# Altium PCB PCB.PcbDoc
Units mm, origin at the board's own origin, x right, y up, seen from the top; angles counter-clockwise.
Board outline 32.21 x 40 mm, 4 copper layers (Top Layer, Signal Layer 1, Signal Layer 2, Bottom Layer), stack 0.778 mm thick; 94 components, 53 nets, 416 pads, 156 vias.
Unrouted connection lines stored in the file: 8.
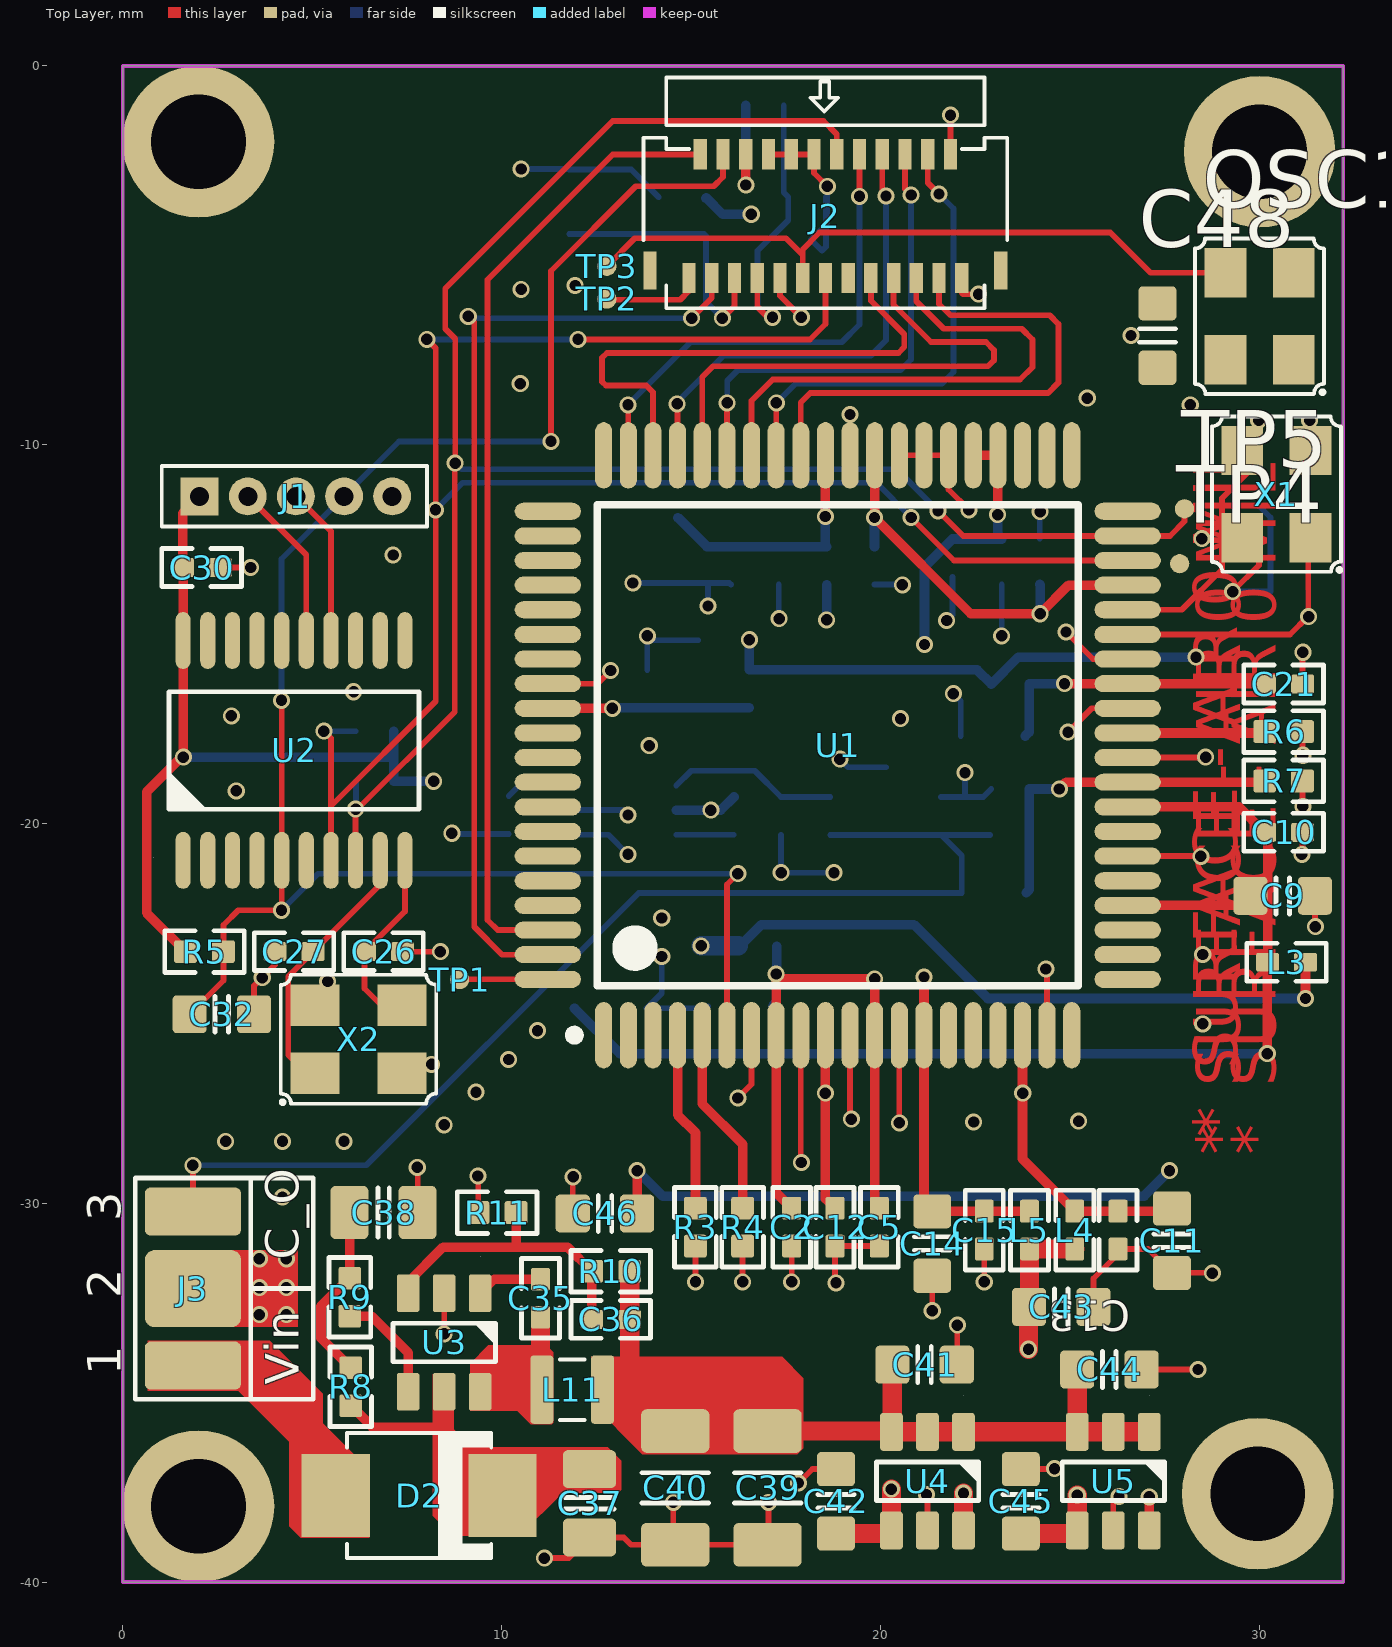
[diagram p0: Top Layer view]
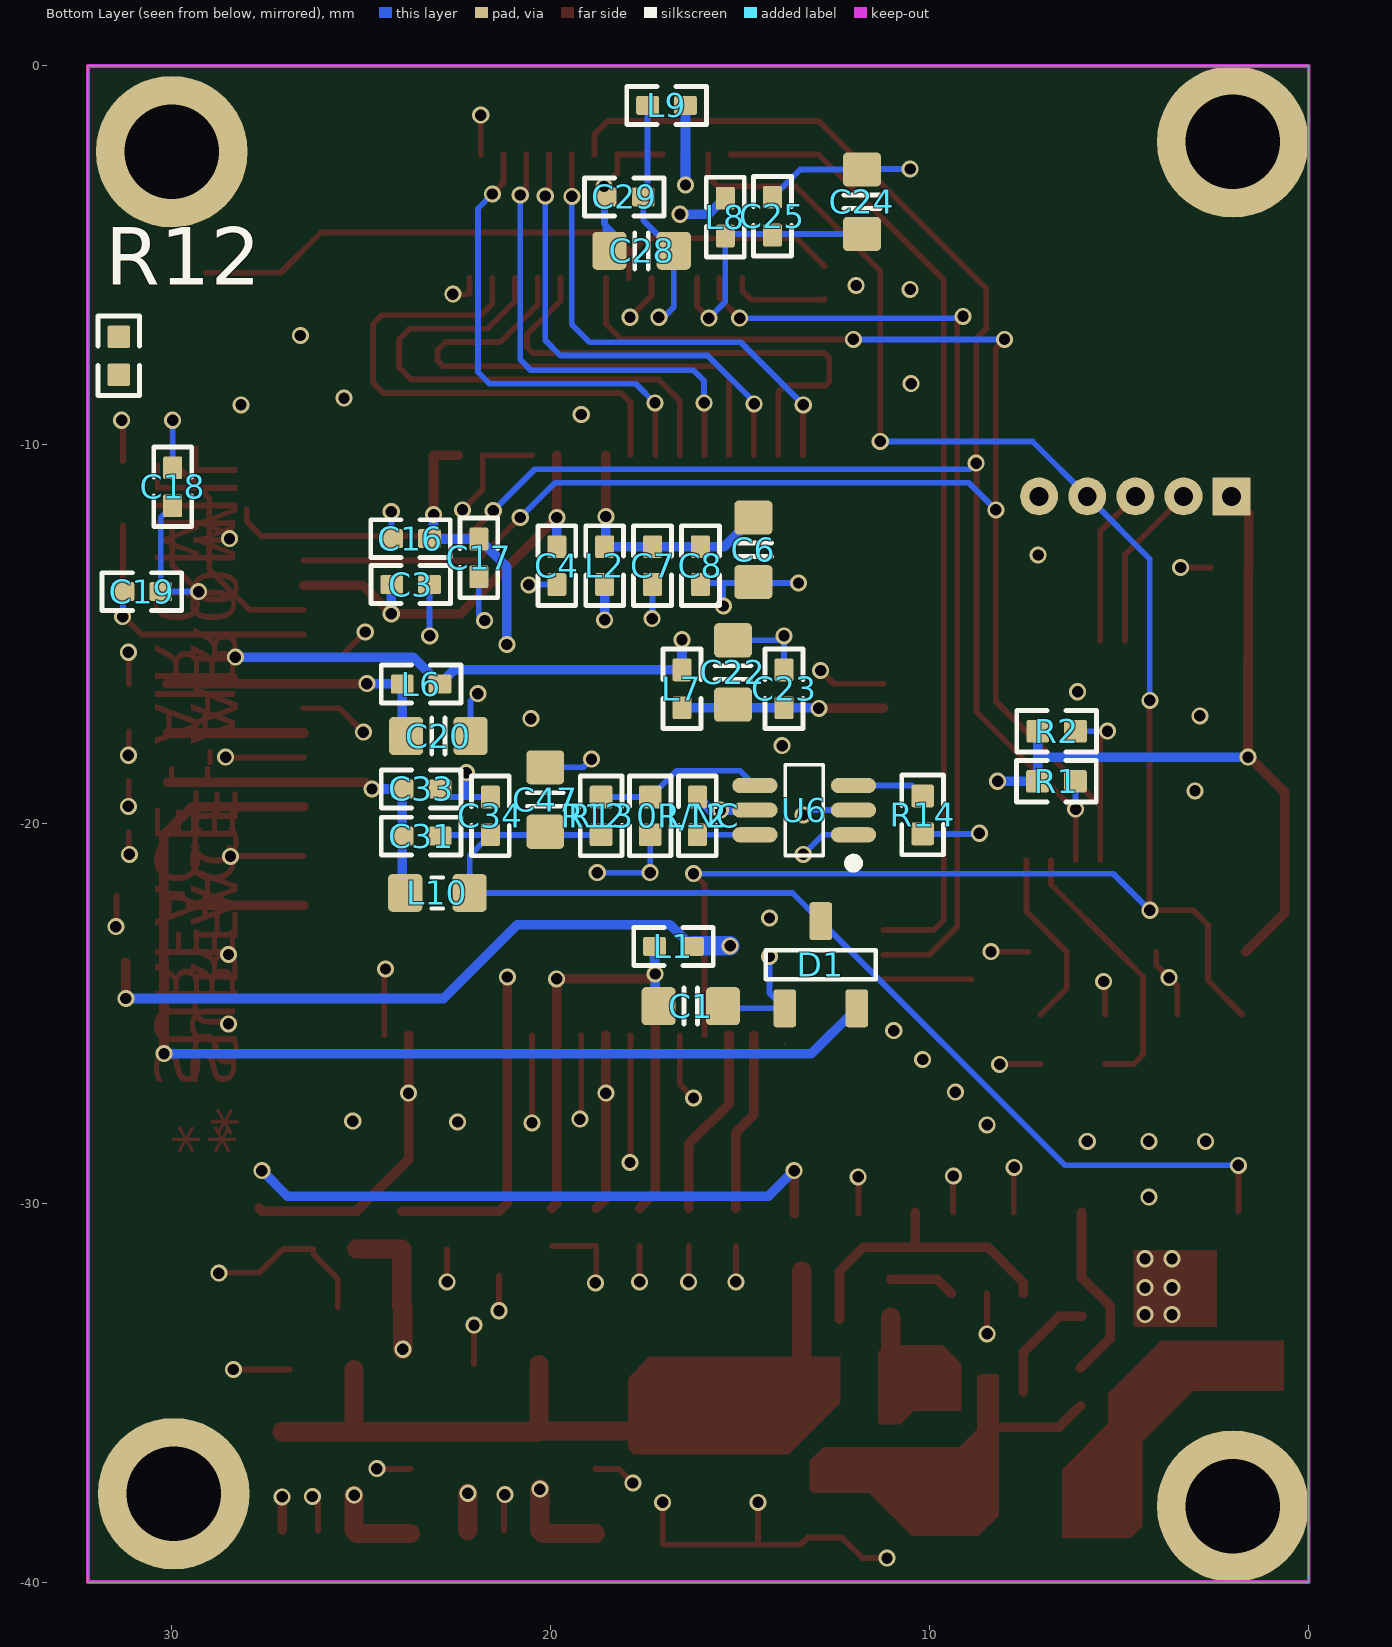
[diagram p1: Bottom Layer view, seen from below]
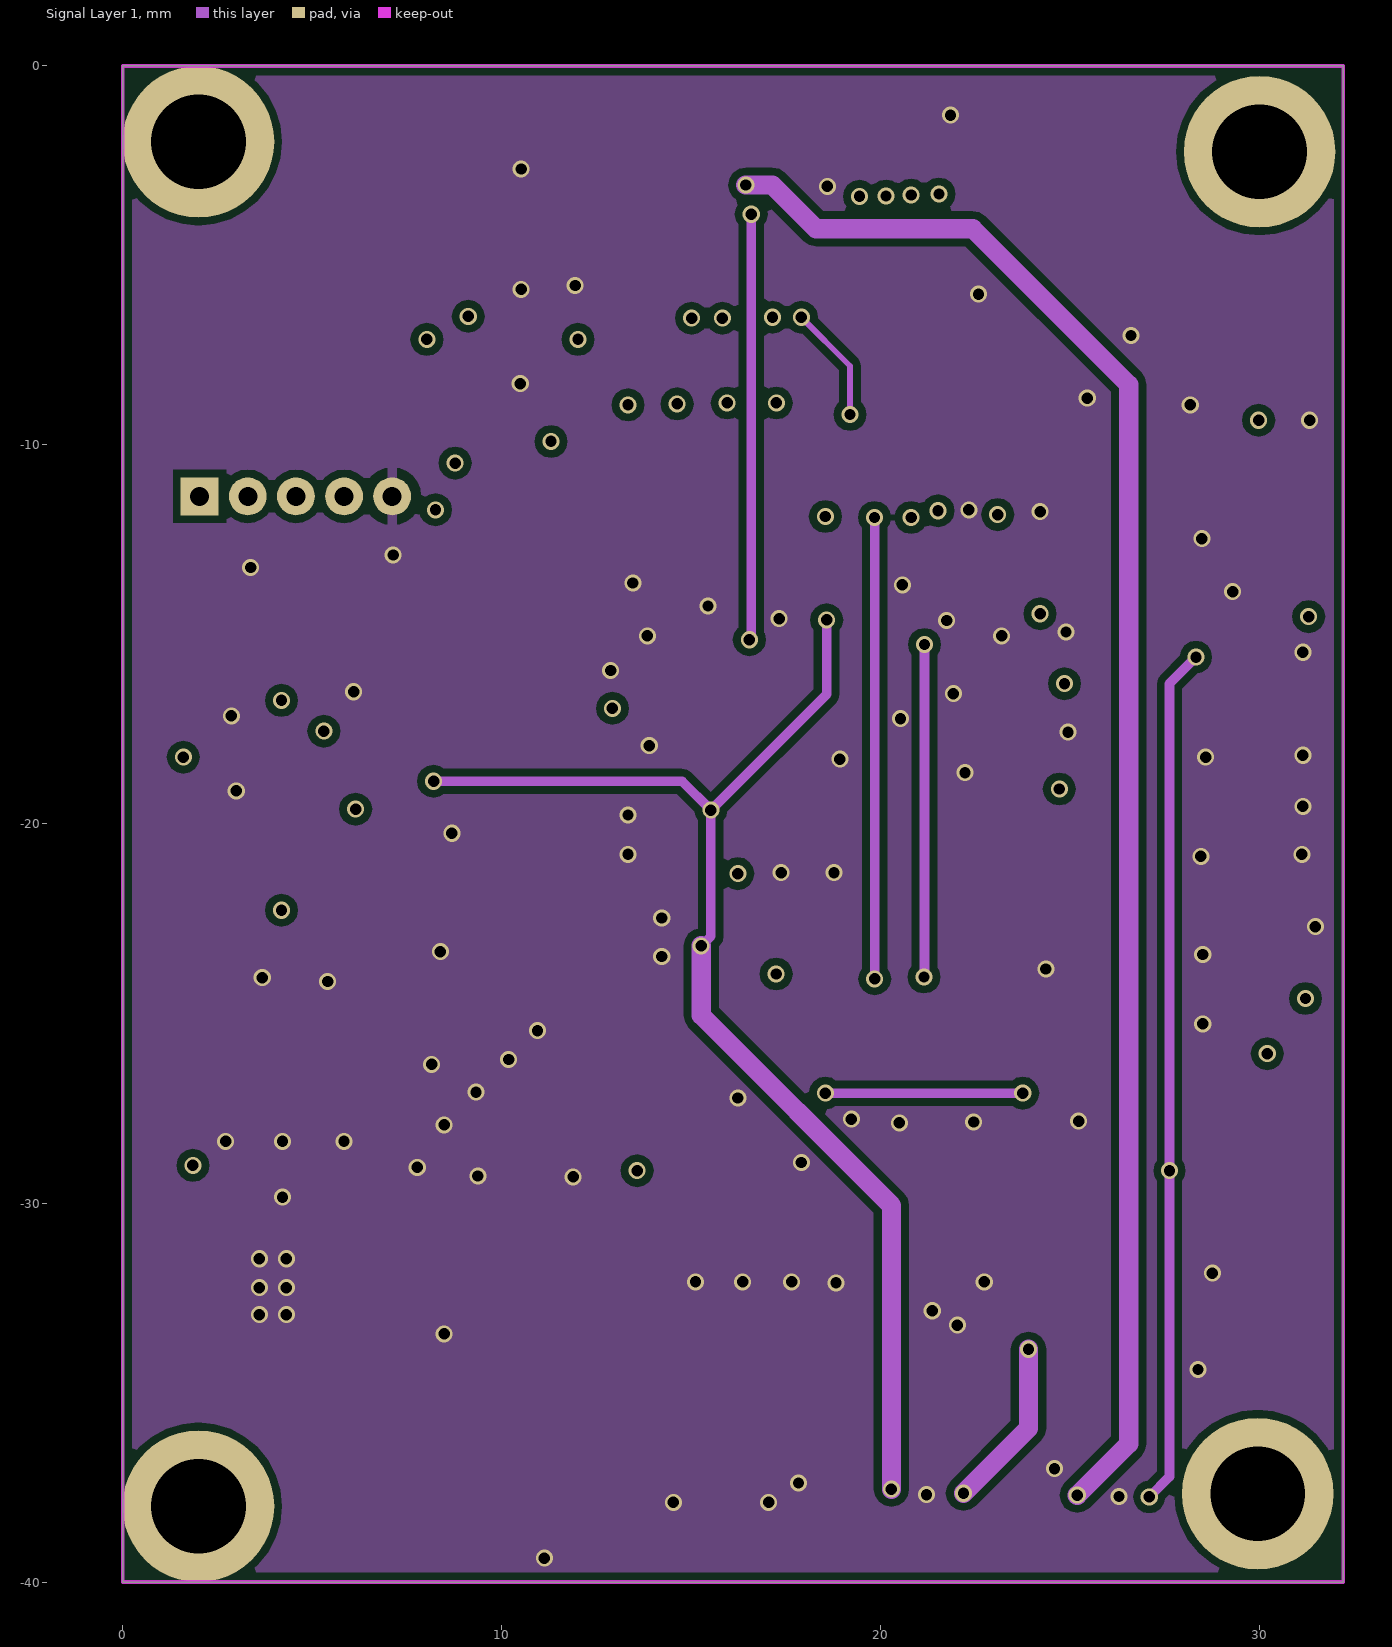
[diagram p2: Signal Layer 1]
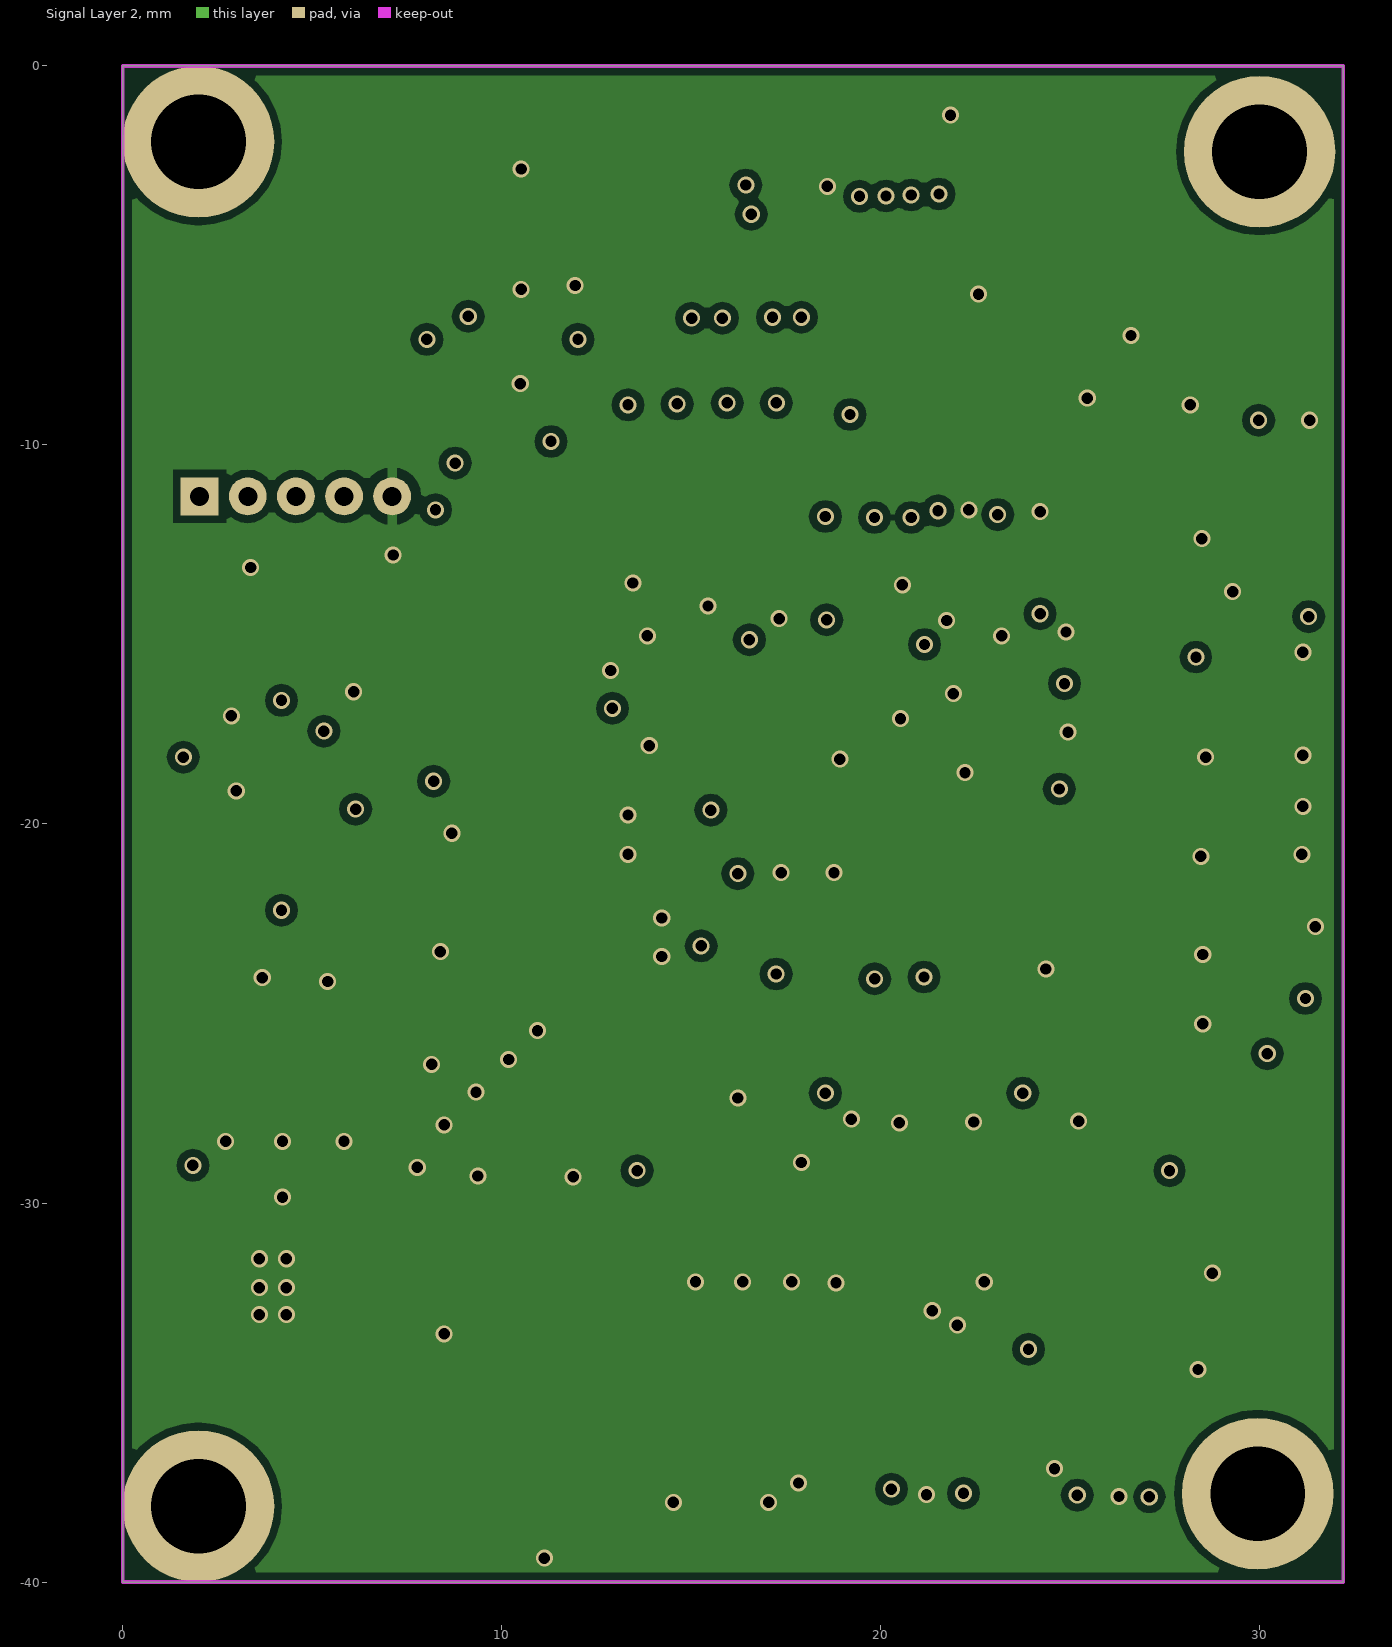
[diagram p3: Signal Layer 2]
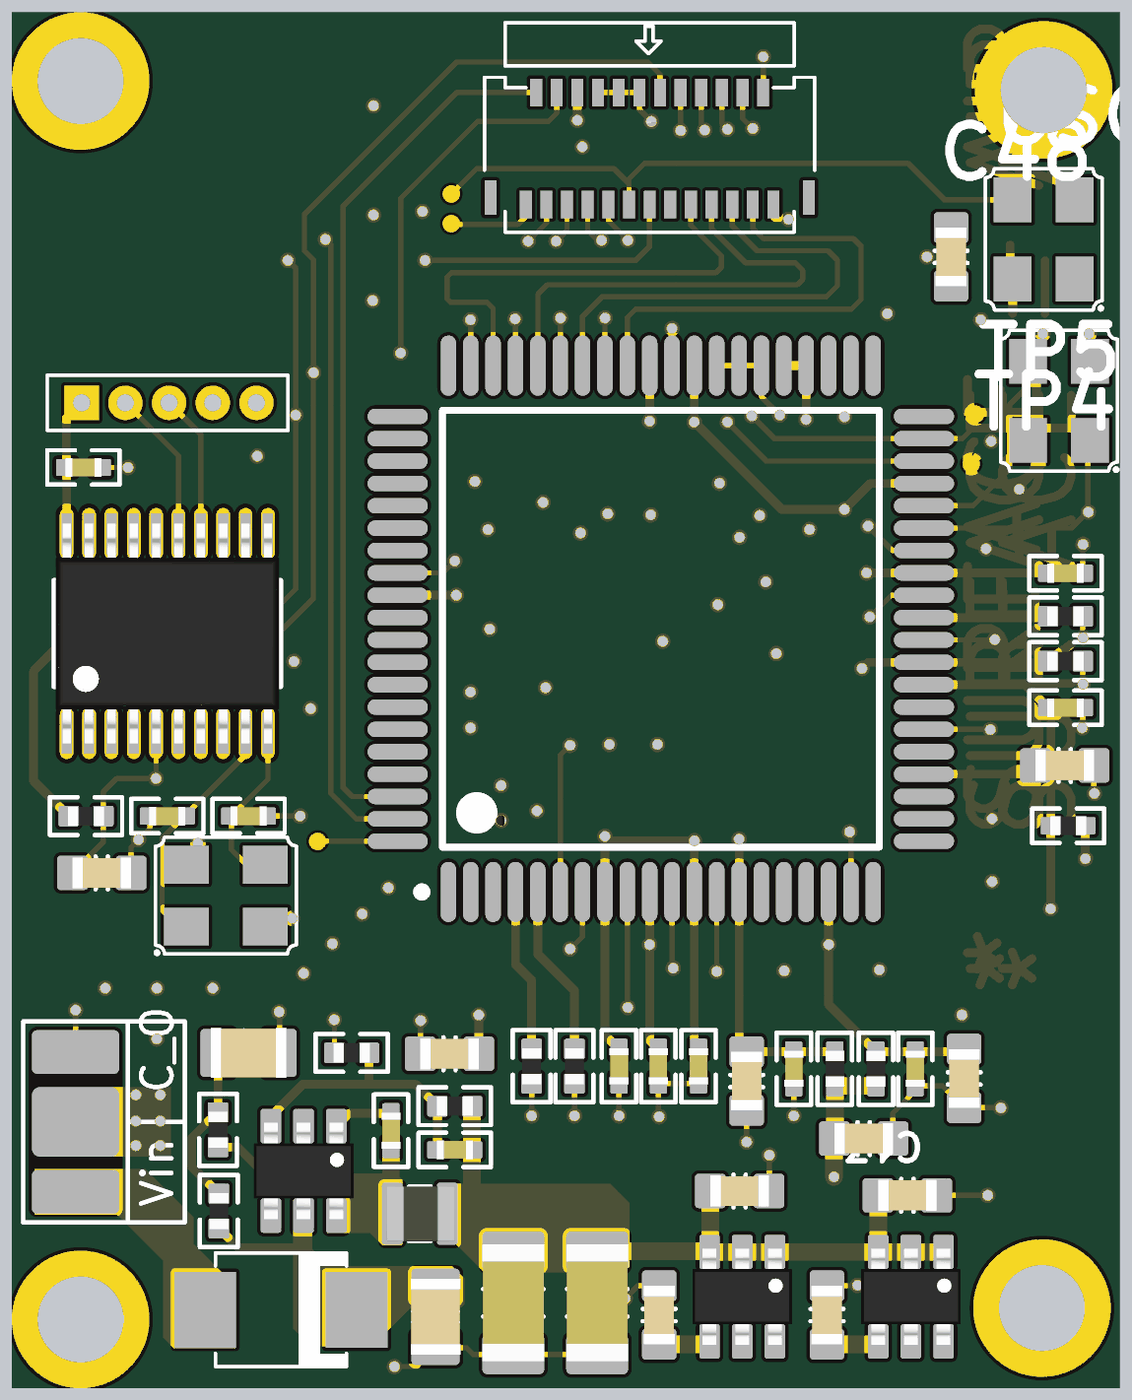
[diagram p4: 3D render of the assembled board from above, using the file's embedded part models]
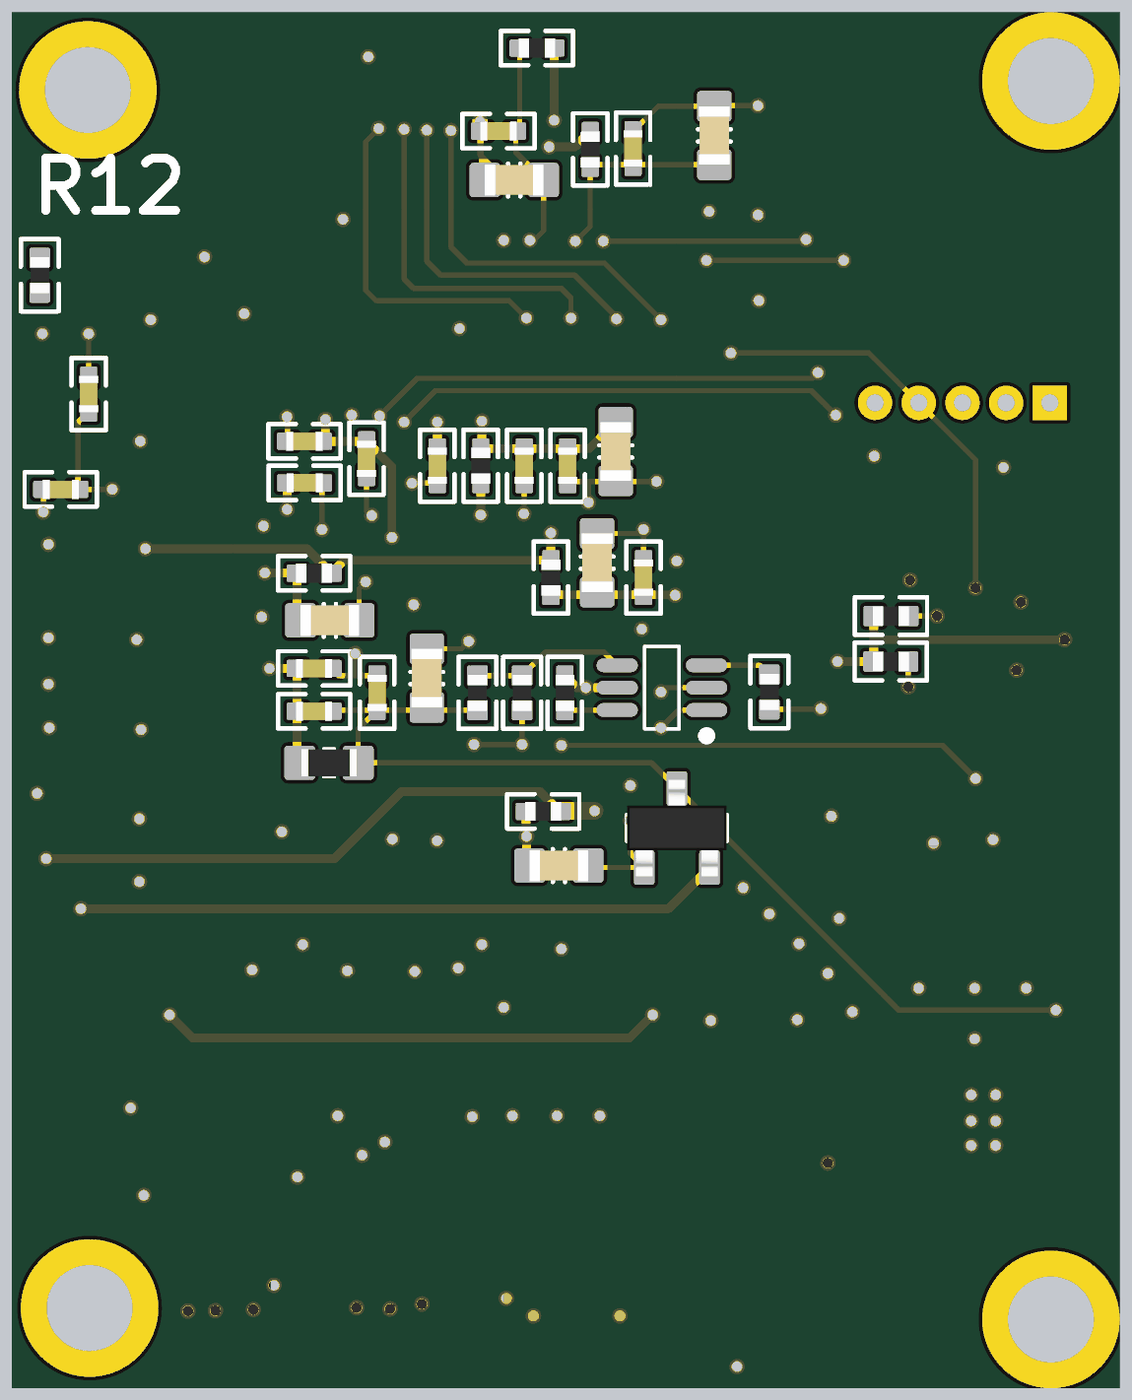
[diagram p5: 3D render of the assembled board from below, using the file's embedded part models]

## Layer stack, top to bottom
Top Solder: solder mask 0.0102, Solder Resist, Dk 3.5
Top Layer: signal copper 0.0356
GND: core 0.254, FR-4, Dk 4.2
Signal Layer 1: signal copper 0.036
Dielectric 3: prepreg 0.127, Dk 4.2
Signal Layer 2: signal copper 0.036
VCC: core 0.254, Dk 4.2
Bottom Layer: signal copper 0.0356
Bottom Solder: solder mask 0.0102, Solder Resist, Dk 3.5

## Board outline
0,-40 0,0 32.207,0 32.207,-40

## Design rules (kind name [scope] priority, off if disabled: settings)
Clearance Clearance_1 [(InNamedPolygon('GND_BOT') OR InNamedPolygon('GND_TOP'))] p1: gap=0.3
Clearance [All] p2: gap=0.2
FabricationTestPointUsage TestPointUsage [All] p1: valid=0 allowmultiple=FALSE
FabricationTestpoint Testpoint [All] p1: side=3 testpointundercomponent=TRUE minsize=1.016 maxsize=2.54 preferedsize=1.524 minholesize=0 maxholesize=1.016 preferedholesize=0.813 testpointgrid=0.025 allowsidetop=TRUE allowsidebottom=TRUE usegrid=TRUE gridtolerance=0
PolygonConnect PolygonConnect_1 [(InPadClass('All Pads'))] p1: connectstyle=Relief reliefconductorwidth=0.254 reliefentries=4 polygonreliefangle="90 Angle" airgapwidth=0.254
PolygonConnect [All] p2: connectstyle=Direct reliefconductorwidth=0.254 reliefentries=4 polygonreliefangle="90 Angle" airgapwidth=0.254
RoutingVias [All] p1: holewidth=0.3 width=0.45 viastyle="Through Hole" minholewidth=0.3 minwidth=0.45 maxholewidth=0.3 maxwidth=0.45
SilkToSolderMaskClearance SilkscreenOverComponentPads [IsPad] p1: minsilkscreentomaskgap=0.254 clearancetoexposedcopper=TRUE
SolderMaskExpansion [All] p1: expansion=0.102
Width [All] p1: maxlimit=1 minlimit=0.152 preferedwidth=0.4
27 further rules are at their usual default settings.

## Classes and differential pairs
component class POWER: C35 C36 C37 C38 C39 C40 C41 C42 C43 C44 C45 C46 C48 D2 J3 L11 OSC1 R8 R9 R10 R11 U3 U4 U5
component class MAIN: C1 C2 C3 C4 C5 C6 C7 C8 C9 C10 C11 C12 C13 C14 C15 C16 C17 C18 C19 C20 C21 C22 C23 C24 C25 C26 C27 C28 C29 C30 C31 C32 C33 C34 C47 D1 J1 J2 L1 L2 L3 L4 L5 L6 L7 L8 L9 L10 L12 R1 R2 R3 R4 R5 R6 R7 R12 "R12 0R/NC" R13 R14 TP1 TP2 TP3 TP4 TP5 U1 U2 U6 X1 X2
net class Undefined: D0 D1 D2 D3 D4 D5 D6 D7

## Components (designator, comment, footprint, x,y, rotation, side; value= is the part's Value field where it differs from the comment)
C1 "10uF" CAPC1608X90N 16.302,-24.806 r180 bottom
C2 "0.1uF" CAPC1005X55N 17.653,-30.638 r270 top
C3 "0.1uF" CAPC1005X55N 23.694,-13.681 r180 bottom
C4 "0.1uF" CAPC1005X55N 19.837,-13.183 r270 bottom
C5 "0.1uF" CAPC1005X55N 19.964,-30.638 r270 top
C6 "10uF" CAPC1608X90N 14.651,-12.766 r270 bottom
C7 "0.1uF" CAPC1005X55N 17.311,-13.183 r270 bottom
C8 "0.1uF" CAPC1005X55N 16.048,-13.183 r270 bottom
C9 "10uF" CAPC1608X90N 30.607,-21.895 r0 top
C10 "0.1uF" CAPC1005X55N 30.632,-20.218 r0 top
C11 "10uF" CAPC1608X90N 27.686,-30.993 r270 top
C12 "0.1uF" CAPC1005X55N 18.796,-30.638 r270 top
C13 "0.1uF" CAPC1005X55N 26.264,-30.714 r270 top
C14 "10uF" CAPC1608X90N 21.361,-31.069 r270 top
C15 "0.1uF" CAPC1005X55N 22.733,-30.714 r270 top
C16 "0.1uF" CAPC1005X55N 23.698,-12.471 r0 bottom
C17 "0.1uF" CAPC1005X55N 21.895,-12.979 r270 bottom
C18 "18pF" CAPC1005X55N 29.972,-11.1 r270 bottom
C19 "18pF" CAPC1005X55N 30.785,-13.868 r180 bottom
C20 "10uF" CAPC1608X90N 22.962,-17.678 r180 bottom
C21 "0.1uF" CAPC1005X55N 30.632,-16.307 r0 top
C22 "10uF" CAPC1608X90N 15.189,-16.002 r90 bottom
C23 "0.1uF" CAPC1005X55N 13.843,-16.434 r90 bottom
C24 "10uF" CAPC1608X90N 11.786,-3.581 r90 bottom
C25 "0.1uF" CAPC1005X55N 14.148,-3.962 r90 bottom
C26 "18pF" CAPC1005X55N 6.883,-23.368 r0 top
C27 "18pF" CAPC1005X55N 4.521,-23.368 r180 top
C28 "10uF" CAPC1608X90N 17.602,-4.877 r0 bottom
C29 "0.1uF" CAPC1005X55N 18.059,-3.454 r0 bottom
C30 "0.1uF" CAPC1005X55N 2.083,-13.233 r0 top
C31 "33pF" CAPC1005X55N 23.419,-20.32 r180 bottom
C32 "10uF" CAPC1608X90N 2.616,-25.019 r0 top
C33 "0.1uF" CAPC1005X55N 23.419,-19.075 r180 bottom
C34 "270PF" CAPC1005X55N 21.59,-19.787 r90 bottom
C35 "0.1uF" CAPC1005X55N 11.024,-32.512 r270 top
C36 "10nF" CAPC1005X55N 12.878,-33.071 r180 top
C37 "10uF/16V(2012)" CAPC2012X135N 12.319,-37.922 r270 top
C38 "10uF/16V(2012)" CAPC2012X135N 6.883,-30.251 r0 top
C39 "22uF/6.3V(3216)" CAPC3216X100N 17.018,-37.516 r270 top
C40 "22uF/6.3V(3216)" CAPC3216X100N 14.58,-37.516 r270 top
C41 "1uF/6.3V" CAPC1608X90N 21.158,-34.265 r0 top
C42 "1uF/6.3V" CAPC1608X90N 18.821,-37.871 r90 top
C43 "1uF/6.3V" CAPC1608X90N 24.765,-32.741 r0 top
C44 "1uF/6.3V" CAPC1608X90N 26.035,-34.392 r0 top
C45 "1uF/6.3V" CAPC1608X90N 23.698,-37.871 r90 top
C46 "1uF/6.3V" CAPC1608X90N 12.725,-30.277 r180 top
C47 "10uF" CAPC1608X90N 20.142,-19.355 r90 bottom
C48 "1uF/6.3V" CAPC1608X90N 27.305,-7.112 r90 top
D1 "BAT54SLT1" SOT23-3 12.873,-23.714 r90 bottom
D2 "RB050LA-40" RB50LA-40 7.823,-37.719 r270 top
J1 "1.27mm" "JP 1.27mm" 4.572,-11.354 r0 top
J2 "00  6296 025 230 883" "FPC ASSY 0.3MM" 18.542,-3.962 r0 top
J3 "pad_3point" Jump_3Way_Text1 1.854,-32.258 r90 top
L1 "FB" INDC1005N 16.759,-23.231 r0 bottom
L2 "FB" INDC1005N 18.574,-13.183 r90 bottom
L3 "FB" INDC1005N 30.709,-23.647 r180 top
L4 "FB" INDC1005N 25.121,-30.714 r90 top
L5 "FB" INDC1005N 23.927,-30.714 r90 top
L6 "FB" INDC1005N 23.419,-16.307 r0 bottom
L7 "FB" INDC1005N 16.535,-16.434 r270 bottom
L8 "FB" INDC1005N 15.392,-3.988 r270 bottom
L9 "FB" INDC1005N 16.942,-1.041 r0 bottom
L10 "FB" INDC1608N 22.987,-21.819 r180 bottom
L11 "NRS2012T 4R7M GJ" INDC2016X180N 11.862,-34.925 r0 top
L12 "FB" INDC1005N 16.129,-19.787 r90 bottom
OSC1 "27Mhz" XTAL-4pin-3225 29.997,-6.604 r90 top
R1 "4.7K" RESC1005X40N 6.655,-18.872 r0 bottom
R2 "4.7K" RESC1005X40N 6.65,-17.551 r0 bottom
R3 "10K" RESC1005X40N 15.113,-30.638 r90 top
R4 "10K" RESC1005X40N 16.358,-30.638 r90 top
R5 "10K" RESC1005X40N 2.159,-23.368 r180 top
R6 "1.2K,1%" RESC1005X40N 30.632,-17.561 r0 top
R7 "75" RESC1005X40N 30.632,-18.865 r0 top
R8 "10K" RESC1005X40N 6.02,-34.849 r90 top
R9 "100K" RESC1005X40N 5.994,-32.487 r270 top
R10 "30.9K,1%" RESC1005X40N 12.878,-31.801 r180 top
R11 "5.76K,1%" RESC1005X40N 9.881,-30.251 r180 top
R12 "0R" RESC1005X40N 31.394,-7.645 r270 bottom
"R12 0R/NC" "0R" RESC1005X40N 17.374,-19.787 r270 bottom
R13 "75R2" RESC1005X40N 18.669,-19.787 r90 bottom
R14 "0R" RESC1005X40N 10.185,-19.761 r270 bottom
TP1 "TEST POINT" TP-R20 8.89,-24.105 r270 top
TP2 "TEST POINT" TP-R20 12.776,-6.147 r270 top
TP3 "TEST POINT" TP-R20 12.776,-5.283 r270 top
TP4 "TEST POINT" TP-R20 27.889,-13.132 r90 top
TP5 "TEST POINT" TP-R20 28.016,-11.684 r90 top
U1 "CH7025/CH7026_LQFP80" TQFP80_N 18.868,-17.923 r90 top
U2 "MINI51FDE" TSSOP65P640X120-20N 4.521,-18.059 r90 top
U3 "FR9801" SOT23-6 8.484,-33.68 r270 top
U4 "FP6121-IS9GTR/TSOT23-6L" SOT23-6 21.234,-37.338 r270 top
U5 "FP6121-IS9GTR/TSOT23-6L" SOT23-6 26.137,-37.338 r270 top
U6 "OPA361/SC70" SC07 13.31,-19.634 r0 bottom
X1 "Crystal (14.318 MHz)" XTAL-4pin-3225 30.444,-11.296 r90 top
X2 "Crystal (12MHz)" XTAL-4pin-3225 6.223,-25.679 r0 top

## Footprints (in the part's own frame and the unit in brackets; to place one, negate y for a bottom-side part, rotate by r counter-clockwise, add the part's x,y. Pads: shape width x height; smd on the part's side, far side on the other; paste and mask are expansions set on the pad)
CAPC1005X55N [mm] "Chip Capacitor, Body 1.0x0.5mm, EIA 0402, IPC Medium Density"
  round 0.2 on Mech15: 0(0,0)
  rrect20% 0.6x0.5 smd: 1(-0.5,0) 2(0.5,0)
  Top Layer pour cut-out: -0.325,0.375 -0.2,0.5 0.2,0.5 0.325,0.375 0.325,-0.375 0.2,-0.5 -0.2,-0.5 -0.325,-0.375
  silkscreen extent -1.05,-0.5 1.05,0.5, body extent -0.52,-0.27 0.53,0.28, height 0.55
CAPC1608X90N [mm] "Chip Capacitor, Body 1.6x0.8mm, EIA 0603, IPC Medium Density"
  round 0.254 on Mech15: 0(0,0)
  rrect25% 0.9x1 smd: 1(-0.85,0) 2(0.85,0)
  Top Layer pour cut-out: -0.6,0.5 -0.4,0.7 0.4,0.7 0.6,0.5 0.6,-0.5 0.4,-0.7 -0.4,-0.7 -0.6,-0.5
  silkscreen extent -0.18,-0.48 0.18,0.48, body extent -0.85,-0.45 0.85,0.45, height 0.89
CAPC2012X135N [mm] "Chip Capacitor, Body 2.0x1.2mm, EIA 0805, IPC Medium Density"
  round 0.254 on Mech15: 0(0,0)
  rrect25% 1x1.4 smd: 1(-0.9,0) 2(0.9,0)
  Top Layer pour cut-out: -0.675,0.7 -0.475,0.9 0.475,0.9 0.675,0.7 0.675,-0.7 0.475,-0.9 -0.475,-0.9 -0.675,-0.7
  silkscreen extent -0.15,-0.65 0.15,0.65, body extent -1.1,-0.72 1.1,0.73, height 1.34
CAPC3216X100N [mm] "Chip Capacitor, Body 3.2x1.6mm, 1.0mm H, EIA 1206, IPC Medium Density"
  round 0.508 on Mech15: 0(0,0)
  rrect25% 1.15x1.8 smd: 1(-1.5,0) 2(1.5,0)
  silkscreen extent -0.4,-0.88 0.4,0.88, body extent -1.7,-0.9 1.7,0.9, height 1
"FPC ASSY 0.3MM" [mm]
  rect 0.35x0.8 smd: 1(-3.6,-1.63) 2(-3.3,1.63) 3(-3,-1.63) 4(-2.7,1.63) 5(-2.4,-1.63) 6(-2.1,1.63) 7(-1.8,-1.63) 8(-1.5,1.63) 9(-1.2,-1.63) 10(-0.9,1.63) 11(-0.6,-1.63) 12(-0.3,1.63) 13(0,-1.63) 14(0.3,1.63) 15(0.6,-1.63) 16(0.9,1.63) 17(1.2,-1.63) 18(1.5,1.63) 19(1.8,-1.63) 20(2.1,1.63) 21(2.4,-1.63) 22(2.7,1.63) 23(3,-1.63) 24(3.3,1.63) 25(3.6,-1.63)
  rect 0.35x1 smd: ""(-4.625,-1.43) ""(4.625,-1.43)
  silkscreen extent -4.8,-2.43 4.8,3.66
INDC1005N [mm] "Chip Inductor, Body 1.0x0.5mm, EIA 0402, IPC Medium Density"
  round 0.2 on Mech15: 0(0,0)
  rrect20% 0.6x0.5 smd: 1(-0.5,0) 2(0.5,0)
  Top Layer pour cut-out: -0.325,0.375 -0.2,0.5 0.2,0.5 0.325,0.375 0.325,-0.375 0.2,-0.5 -0.2,-0.5 -0.325,-0.375
  silkscreen extent -1.05,-0.5 1.05,0.5, body extent -0.52,-0.27 0.53,0.28, height 0.4
INDC1608N [mm] "Chip bead, Body 1.6x0.8mm, 0603, IPC Medium Density"
  round 0.254 on Mech15: 0(0,0)
  rrect25% 0.9x1 smd: 1(-0.85,0) 2(0.85,0)
  Top Layer pour cut-out: -0.4,0.6 0.4,0.6 0.4,-0.6 -0.4,-0.6
  silkscreen extent -0.15,-0.41 0.15,0.41, body extent -0.8,-0.4 0.8,0.4, height 0.79
INDC2016X180N [mm] "Chip Inductor, 2-Leads, Body 2.0x1.6mm, IPC 0806 Medium Density"
  round 0.254 on Mech15: 0(0,0)
  rrect25% 0.6x1.8 smd: 1(-0.8,0) 2(0.8,0)
  Top Layer pour cut-out: -0.5,0.875 0.5,0.875 0.5,-0.875 -0.5,-0.875
  silkscreen extent -0.33,-0.8 0.33,0.8, body extent -0.97,-0.8 1.03,0.8, height 0.99
"JP 1.27mm" [mm]
  rect 1x1 hole 0.5: 1(-2.54,0)
  round 1 hole 0.5: 2(-1.27,0) 3(0,0) 4(1.27,0) 5(2.54,0)
  silkscreen extent -3.54,-0.8 3.46,0.8
Jump_3Way_Text1 [mil] "SMT jumper for fixed or variable"
  rrect25% 50x100 smd: 1(-80,0) 3(80,0)
  rrect25% 80x100 smd: 2(0,0)
  rrect25% 218x108 on Top Solder: SM(0,0)
  silkscreen extent -115,-125 115,60
RB50LA-40 [mm]
  rect 2.2x1.8 smd: 1(0,-2.2) 2(0,2.2)
  silkscreen extent -1.65,-1.91 1.65,1.91
RESC1005X40N [mm] "Chip Resistor, Body 1.0x0.5mm, EIA 0402, IPC Medium Density"
  round 0.2 on Mech15: 0(0,0)
  rrect20% 0.6x0.6 smd: 1(-0.5,0) 2(0.5,0)
  Top Layer pour cut-out: -0.325,0.375 -0.2,0.5 0.2,0.5 0.325,0.375 0.325,-0.375 0.2,-0.5 -0.2,-0.5 -0.325,-0.375
  silkscreen extent -1.05,-0.55 1.05,0.55, body extent -0.52,-0.27 0.53,0.28, height 0.4
SC07 [mm]
  oval 1.2x0.4 smd: 1(-1.3,0.65) 2(-1.3,0) 3(-1.3,-0.65) 4(1.3,-0.65) 5(1.3,0) 6(1.3,0.65)
  silkscreen extent -1.42,-1.2 0.5,1.52
SOT23-3 [mm] "SOT23, 3 pin"
  round 0.5 on Mech15: 0(0,0)
  rrect25% 1x0.6 smd: 1(-1.15,0.95) 2(-1.15,-0.95) 3(1.15,0)
  silkscreen extent -0.38,-1.45 0.38,1.45, body extent -1.4,-1.45 1.4,1.45, height 1.29
SOT23-6 [mm]
  round 0.5 on Mech15: 0(0,0)
  rrect25% 1x0.6 smd: 1(-1.3,0.95) 2(-1.3,0) 3(-1.3,-0.95) 4(1.3,-0.95) 5(1.3,0) 6(1.3,0.95)
  silkscreen extent -0.51,-1.35 0.51,1.35, body extent -1.4,-1.45 1.4,1.45, height 1.44
TP-R20 [mil]
  round 20 smd paste-30 mask+3: 1(0,0)
  body extent -11,-11 11,11
TQFP80_N [mm] "80-Pin Thin Plastic Quad Flat Pack 0.65 mm Pitch, IPC Medium Density"
  oval 1.75x0.45 smd: 1(-7.65,6.175) 2(-7.65,5.525) 3(-7.65,4.875) 4(-7.65,4.225) 5(-7.65,3.575) 6(-7.65,2.925) 7(-7.65,2.275) 8(-7.65,1.625) 9(-7.65,0.975) 10(-7.65,0.325) 11(-7.65,-0.325) 12(-7.65,-0.975) 13(-7.65,-1.625) 14(-7.65,-2.275) 15(-7.65,-2.925) 16(-7.65,-3.575) 17(-7.65,-4.225) 18(-7.65,-4.875) 19(-7.65,-5.525) 20(-7.65,-6.175) 41(7.65,-6.175) 42(7.65,-5.525) 43(7.65,-4.875) 44(7.65,-4.225) 45(7.65,-3.575) 46(7.65,-2.925) 47(7.65,-2.275) 48(7.65,-1.625) 49(7.65,-0.975) 50(7.65,-0.325) 51(7.65,0.325) 52(7.65,0.975) 53(7.65,1.625) 54(7.65,2.275) 55(7.65,2.925) 56(7.65,3.575) 57(7.65,4.225) 58(7.65,4.875) 59(7.65,5.525) 60(7.65,6.175)
  oval 0.45x1.75 smd: 21(-6.175,-7.65) 22(-5.525,-7.65) 23(-4.875,-7.65) 24(-4.225,-7.65) 25(-3.575,-7.65) 26(-2.925,-7.65) 27(-2.275,-7.65) 28(-1.625,-7.65) 29(-0.975,-7.65) 30(-0.325,-7.65) 31(0.325,-7.65) 32(0.975,-7.65) 33(1.625,-7.65) 34(2.275,-7.65) 35(2.925,-7.65) 36(3.575,-7.65) 37(4.225,-7.65) 38(4.875,-7.65) 39(5.525,-7.65) 40(6.175,-7.65) 61(6.175,7.65) 62(5.525,7.65) 63(4.875,7.65) 64(4.225,7.65) 65(3.575,7.65) 66(2.925,7.65) 67(2.275,7.65) 68(1.625,7.65) 69(0.975,7.65) 70(0.325,7.65) 71(-0.325,7.65) 72(-0.975,7.65) 73(-1.625,7.65) 74(-2.275,7.65) 75(-2.925,7.65) 76(-3.575,7.65) 77(-4.225,7.65) 78(-4.875,7.65) 79(-5.525,7.65) 80(-6.175,7.65)
  silkscreen extent -7.77,-6.35 6.35,7.07, body extent -7,-7 7,7, height 1.6
TSSOP65P640X120-20N [mm] "TSSOP, 20-Leads, Body 6.6x4.5mm (max), Pitch 0.65mm, IPC Medium Density"
  round 0.508 on Mech15 mask+0.127: 0(0,0)
  oval 1.5x0.4 smd paste-1 mask+0.127: 1(-2.9,2.925) 2(-2.9,2.275) 3(-2.9,1.625) 4(-2.9,0.975) 5(-2.9,0.325) 6(-2.9,-0.325) 7(-2.9,-0.975) 8(-2.9,-1.625) 9(-2.9,-2.275) 10(-2.9,-2.925) 11(2.9,-2.925) 12(2.9,-2.275) 13(2.9,-1.625) 14(2.9,-0.975) 15(2.9,-0.325) 16(2.9,0.325) 17(2.9,0.975) 18(2.9,1.625) 19(2.9,2.275) 20(2.9,2.925)
  silkscreen extent -1.55,-3.3 1.55,3.3, body extent -3.2,-3.25 3.2,3.25, height 1.2
XTAL-4pin-3225 [mm] "3.2 x 2.5 x 0.8 mm ceramic  crystal"
  rect 1.3x1.1 smd: 1(-1.15,-0.9) 2(1.15,-0.9) 3(1.15,0.9) 4(-1.15,0.9)
  silkscreen extent -2.05,-1.71 2.05,1.7, body extent -1.6,-1.25 1.6,1.25, height 0.8

## Part data
C1 C6 C9 C11 C14 C20 C22 C24 C28 C32 C47: library part PCAP_0, "CAP - 10uF 16V TE Tant"
C2 C3 C4 C5 C7 C8 C10 C12 C13 C15 C16 C17 C21 C23 C25 C29: library part C_0
C18 C19 C26 C27 C31 C33 C34: library part CAP
C30: library part "CAP NP_3"
C35: library part "CAP NP_16"
C36: library part "CAP NP_13"
C37: library part "CAP NP_17"
C38: library part "CAP NP_18"
C39: library part "CAP NP_15"
C40: library part "CAP NP_14"
C41 C44 C48: library part "CAP NP_0"
C42 C43 C45 C46: library part "CAP NP_1"
D1: library part "DIODE DUAL SERIES SOT23"
D2: library part "DIODE PIN_1"
J1: library part CON5_Dup1
J2: library part CON25
J3: library part CON3
L1 L2 L3 L4 L5 L6 L7 L8 L9 L10 L12: library part INDUCTOR
L11: library part INDUCTOR_0
OSC1: library part XO_50Mhz_3V3_50ppm_SMD, "OSC XO 50.000MHZ CMOS SMD"
R1 R2 R7: library part RESISTOR
R3 R4: library part R
R5 R12 "R12 0R/NC" R13 R14: library part 0R,1/10W,5%,0603_9, "0R,1/10W,5%,0603"
R6: library part R_4
R8 R9: library part 0R,1/10W,5%,0603_0, "0R,1/10W,5%,0603"
R10: library part 0R,1/10W,5%,0603_10, "0R,1/10W,5%,0603"
R11: library part 0R,1/10W,5%,0603_11, "0R,1/10W,5%,0603"
TP1 TP4 TP5: library part "Test Point_0"
TP2: library part "Test Point_1"
TP3: library part "Test Point_2"
U1: library part CH7025_LQFP80_0
U2: library part "IC TvDecoder TI TVP5150 QFP32_2"
U3: library part R1244N001B_1
U4 U5 U6: library part "IC DC/DC RT8258 SOT26_0"
X1: library part 535-9118-1-ND_0
X2: library part 535-9118-1-ND_1

## Free pads (board coordinates)
  round 4 hole 2.5: ""(2,-38) ""(2,-2) ""(29.947,-37.668) ""(29.997,-2.261)

## Via types
v1: diameter 0.45, hole 0.3, Top Layer to Bottom Layer, tented both sides, 156 vias

## Nets (pads, with @x,y where several pads share a name; then routed paths per layer and width w, separated by ;. In a path a pad name is that pad's centre, name@x,y a point inside that pad or via, vN(x,y) a via of type N, cw(c..) or ccw(c..) an arc to the next point about the centre after c; other vN are vias at no path point)
AGND: "R12 0R/NC.2" C1.2 C2.2 C3.2 C4.2 C5.2 C6.2 C7.2 C8.2 C9.2 C10.2 C11.2 C12.2 C13.2 C14.2 C15.2 C16.2 C17.2 C18.2 C19.2 C20.2 C21.2 C22.2 C23.2 C24.2 C25.2 C26.2 C27.2 C28.2 C29.2 C30.2 C32.2 C33.2 C34.2 C37.2 C38.2 C39.2 C40.2 C41.2 C42.2 C43.2 C44.2 C45.2 C46.2 C47.2 C48.2 D1.1 J1.5 J2.8 J2.10 J2.12 J2.15 J2.24 J2.25 J3.2 OSC1.2 R3.1 R4.1 R6.2 R7.2 R11.2 R14.2 U1.7 U1.9 U1.11 U1.13 U1.19 U1.26 U1.30 U1.32 U1.34 U1.46 U1.47 U1.48 U1.68 U3.2 U4.5 U5.5 U6.1 U6.2 X1.2 X1.4 X2.2 X2.4 | length 106.2
  Top Layer w0.152: C30.2 v1(3.378,-13.233) ; C32.2 3.466,-24.271 v1(3.683,-24.054) 4.021,-23.716 C27.2 ; X2.4@5.373,-25.029 5.373,-24.193 v1(5.41,-24.155) ; X2.2@7.073,-26.329 v1@8.143,-26.329 ; C26.2 v1(8.382,-23.368) ; C38.2 v1@7.783,-29.069 ; v1(8.484,-33.452) U3.2 ; R11.2 v1@9.381,-29.294 ; v1(11.125,-39.37) 11.771,-39.37 C37.2 13.219,-38.822 13.413,-39.016 C40.2 C39.2 ; U1.68 12.531,-16.298 v1(12.878,-15.951) ; C46.2 v1@11.875,-29.323 ; C40.2@14.529,-38.965 v1(14.529,-37.897) ; v1(15.113,-32.08) R3.1 ; v1(16.231,-27.229) 16.593,-26.867 U1.7 ; v1(16.358,-32.08) R4.1 ; J2.8 J2.10 J2.12 18.242,-2.824 v1(18.593,-3.175) ; C39.2@17.043,-38.99 v1(17.043,-37.897) ; v1(17.653,-32.08) C2.2 ; v1(17.831,-37.389) 18.198,-37.021 C42.2 ; U1.9 17.893,-28.916 v1(17.907,-28.931) ; v1@18.796,-32.08 C12.2 C5.2 ; v1@19.193,-27.752 U1.11 ; v1(20.493,-27.884) U1.13 ; U1.48 U1.47 U1.46 21.793,-11.175 v1(22.327,-11.709) ; v1(21.209,-37.694) 21.234,-37.719 U4.5 ; v1(21.361,-32.842) C14.2 ; J2.24 21.842,-1.297 v1(21.844,-1.295) ; C41.2@22.022,-34.251 v1(22.022,-33.223) ; J2.25 22.142,-5.988 22.174,-6.02 v1(22.581,-6.02) ; v1(22.733,-32.08) C15.2 ; C45.2 24.574,-37.021 v1(24.587,-37.008) ; U1.19 v1@24.393,-23.859 ; v1(24.892,-14.935) 25.604,-15.648 U1.34 ; v1(24.943,-17.577) 25.572,-16.948 U1.32 ; C43.2 25.615,-31.992 26.264,-31.344 C13.2 27.057,-31.214 C11.2 v1@28.744,-31.843 ; U5.5 26.137,-37.897 v1(26.289,-37.744) ; U1.26 28.442,-20.848 v1(28.448,-20.853) ; U1.30 28.565,-18.248 v1(28.575,-18.237) ; C44.2 v1(28.372,-34.392) ; v1(29.286,-13.868) 29.982,-13.172 X1.4@29.982,-12.128 ; v1@31.132,-20.785 C10.2 ; v1@31.132,-19.525 R7.2 ; R6.2 31.132,-18.178 v1(31.14,-18.186) ; C21.2 31.132,-15.477 v1(31.14,-15.469) ; X1.2@31.282,-10.428 31.282,-9.383 v1(31.318,-9.347) ; v1@31.457,-22.694 C9.2
  Bottom Layer w0.152: v1(8.687,-20.244) 8.704,-20.261 R14.2 ; v1(10.516,-2.718) 11.772,-2.718 C24.2 13.417,-2.731 C25.2 ; U6.1 12.817,-20.284 v1(13.335,-20.803) ; U6.2 13.208,-19.634 v1(13.335,-19.761) ; v1(13.462,-13.64) 16.005,-13.64 C8.2 ; C23.2 v1(13.843,-15.037) 13.958,-15.152 C22.2 ; v1(14.224,-23.495) 14.224,-24.463 D1.1 15.394,-24.864 C1.2 ; v1(15.443,-14.249) 15.443,-13.665 ; v1@17.311,-14.568 C7.2 ; 17.374,-20.287 v1(17.374,-21.285) v1(18.771,-21.285) ; C29.2 18.559,-4.187 ; v1(18.593,-3.175) 18.593,-4.154 18.559,-4.187 ; v1(18.923,-18.288) 19.14,-18.505 C47.2 ; C4.2 20.566,-13.683 v1(20.574,-13.691) ; C34.2 22.225,-19.287 ; v1(21.742,-14.63) 21.895,-14.478 C17.2 ; v1(21.92,-16.561) 22.112,-16.752 C20.2 ; v1(22.225,-18.644) 22.225,-19.287 ; C33.2 22.708,-19.287 22.225,-19.287 ; v1(23.19,-15.037) 23.194,-15.033 C3.2 ; C16.2 24.198,-11.768 v1(24.206,-11.76) ; v1(29.286,-13.868) C19.2 30.285,-11.913 C18.2 ; 18.559,-4.187 18.161,-4.586 C28.2 18.559,-4.77 18.559,-4.187
  other v1: 3.607,-32.944 4.318,-32.944 3.607,-32.233 4.318,-32.233 18.821,-32.106 28.753,-31.852 3.607,-31.471 4.318,-31.471 4.216,-29.845 11.887,-29.312 9.373,-29.286 7.772,-29.058 2.718,-28.372 4.216,-28.372 5.842,-28.372 8.484,-27.94 22.454,-27.864 25.222,-27.838 19.228,-27.788 9.322,-27.076 8.153,-26.34 10.185,-26.213 10.947,-25.451 28.499,-25.273 24.359,-23.825 28.499,-23.444 31.471,-22.708 14.224,-22.479 31.115,-20.803 31.14,-19.533 2.997,-19.126 13.894,-17.932 20.523,-17.221 2.87,-17.145 6.096,-16.51 17.323,-14.58 7.137,-12.903 28.473,-12.471 28.169,-8.941 25.451,-8.763 10.49,-8.382 26.605,-7.112 10.516,-5.893 11.938,-5.791
AS: R4.2 U1.5 | length 5
  Top Layer w0.254: U1.5 15.293,-27.383 16.358,-28.448 R4.2
ATPG: R3.2 U1.4 | length 4.8
  Top Layer w0.254: U1.4 14.643,-27.673 15.113,-28.143 R3.2
AVDD: C1.1 C2.1 C3.1 C4.1 C5.1 L1.2 U1.8 U1.12 U1.37 U1.49 | length 40.1
  Top Layer w0.254: C2.1 17.243,-29.727 U1.8 v1(17.243,-23.956) 17.371,-24.084 v1(19.843,-24.084) U1.12 19.843,-30.016 C5.1 ; U1.49 19.843,-11.907 v1(19.837,-11.913) 22.377,-14.453 v1(24.206,-14.453) 24.961,-13.698 U1.37
  Signal Layer 1 w0.254: v1(19.843,-24.084) v1@19.843,-11.918
  Signal Layer 2 w0.254: v1(19.837,-11.913) v1@19.843,-11.918
  Bottom Layer w0.254: C1.1 17.243,-24.716 v1(17.243,-23.956) 17.259,-23.939 L1.2 ; C4.1 v1(19.837,-11.913) ; C3.1 24.206,-13.693 v1(24.206,-14.453)
AVDD2_8: C28.1 C29.1 J2.7 L9.2 | length 7.5
  Top Layer w0.152: J2.7 16.742,-6.353 17.018,-6.629 v1(17.145,-6.629)
  Bottom Layer w0.152: v1(17.145,-6.629) 17.018,-6.629 16.752,-6.364 C28.1 17.559,-4.07 C29.1 17.442,-3.337 L9.2
AVDD_DAC: C9.1 C10.1 D1.2 L3.2 U1.24 U1.28 | length 32
  Top Layer w0.254: U1.24 C9.1@29.504,-22.148 ; U1.28 29.462,-19.548 C10.1 30.209,-20.295 30.209,-21.895 ; C9.1 30.209,-21.895 ; v1(30.201,-26.06) L3.2@30.201,-23.655 ; L3.2 30.209,-21.895
  Bottom Layer w0.254: D1.2 13.12,-26.06 v1(30.201,-26.06)
AVDD_PLL: C20.1 C21.1 L6.2 U1.33 | length 7.6
  Top Layer w0.254: v1(24.85,-16.298) U1.33 C21.1@30.123,-16.298
  Bottom Layer w0.254: C20.1 23.919,-17.571 L6.2 23.928,-16.298 v1(24.85,-16.298)
CVBS_OUT: C31.2 C34.1 C47.1 D1.3 J3.3 L10.2 R13.1 | length 30.5
  Top Layer w0.152: J3.3 v1(1.854,-29.007)
  Bottom Layer w0.152: v1(1.854,-29.007) 6.43,-29.007 D1.3 13.618,-21.819 L10.2 22.137,-20.834 C34.1 ; R13.1 C34.1 ; C31.2@22.885,-20.287 C34.1
D0: J2.23 U1.52 | length 14
  Top Layer w0.152: U1.52 17.893,-8.879 18.145,-8.626 24.419,-8.626 24.689,-8.357 24.689,-6.807 24.46,-6.579 21.844,-6.579 21.542,-6.277 J2.23
D1: J2.22 U1.53 | length 12.4
  Top Layer w0.152: U1.53 v1@17.243,-8.89 ; J2.22 21.242,-3.081 v1(21.539,-3.378)
  Bottom Layer w0.152: v1(17.247,-8.89) 17.755,-8.382 21.615,-8.382 21.92,-8.077 21.92,-3.759 v1(21.539,-3.378)
D2: J2.21 U1.54 | length 14
  Top Layer w0.152: U1.54 16.593,-8.835 17.154,-8.274 23.679,-8.274 24.003,-7.95 24.003,-7.214 23.72,-6.931 21.663,-6.931 20.942,-6.21 J2.21
D3: J2.20 U1.55 | length 12.5
  Top Layer w0.152: U1.55 v1@15.943,-8.89 ; J2.20 20.643,-2.334 20.643,-3.244 v1(20.803,-3.404)
  Bottom Layer w0.152: v1(15.951,-8.89) 15.951,-8.306 16.231,-8.026 20.523,-8.026 20.803,-7.747 v1(20.803,-3.404)
D4: J2.19 U1.56 | length 14.1
  Top Layer w0.152: U1.56 15.293,-8.202 15.573,-7.922 22.835,-7.922 22.987,-7.769 22.987,-7.493 22.777,-7.283 21.33,-7.283 20.342,-6.296 J2.19
D5: J2.18 U1.57 | length 12.5
  Top Layer w0.152: U1.57 v1@14.643,-8.915 ; J2.18 20.042,-3.329 v1(20.142,-3.429)
  Bottom Layer w0.152: v1(14.63,-8.915) 14.63,-8.865 15.853,-7.642 19.739,-7.642 20.142,-7.239 v1(20.142,-3.429)
D6: J2.17 U1.58 | length 14
  Top Layer w0.152: U1.58 13.993,-8.608 13.818,-8.433 12.751,-8.433 12.649,-8.331 12.649,-7.696 12.776,-7.569 20.472,-7.569 20.625,-7.417 20.625,-7.077 19.742,-6.194 J2.17
D7: J2.16 U1.59 | length 12.8
  Top Layer w0.152: U1.59 v1@13.343,-8.941 ; v1(19.442,-3.44) J2.16
  Bottom Layer w0.152: v1(13.335,-8.941) 14.986,-7.29 18.974,-7.29 19.442,-6.822 v1(19.442,-3.44)
DAC0: C31.1 C33.1 L10.1 R7.1 U1.29 | length 9
  Top Layer w0.254: v1(24.714,-19.075) 24.892,-18.898 U1.29 R7.1@30.099,-18.898
  Bottom Layer w0.254: L10.1 23.919,-21.737 C31.1 C33.1 v1(24.714,-19.075)
DOVDD2_8: C45.1 C48.1 J2.6 L9.1 OSC1.4 U5.4 | length 47.4
  Top Layer w0.254: v1(16.442,-3.141) J2.6
  Top Layer w0.508: C45.1 U5.4@25.103,-38.721 ; U5.4 v1(25.187,-37.709)
  Signal Layer 1 w0.508: v1(16.442,-3.141) 17.142,-3.141 18.293,-4.293 22.428,-4.293 26.543,-8.407 26.543,-36.352 v1(25.187,-37.709)
  Bottom Layer w0.254: v1(16.442,-3.141) L9.1
DVDD: C22.1 C23.1 L7.2 U1.69 | length 5.3
  Top Layer w0.254: U1.69 v1(12.923,-16.948)
  Bottom Layer w0.254: v1(12.923,-16.948) 12.937,-16.934 C23.1 L7.2
DVDD1_8: C24.1 C25.1 J2.5 L8.2 | length 7.2
  Top Layer w0.152: v1(15.824,-6.655) 16.142,-6.337 J2.5
  Bottom Layer w0.152: C24.1 15.336,-4.431 L8.2 15.392,-6.223 v1(15.824,-6.655)
GCLK: J2.9 U1.50 | length 4.5
  Top Layer w0.152: J2.9 17.342,-6.064 v1(17.907,-6.629) ; v1(19.193,-9.195) v1@19.193,-9.093
  Signal Layer 1 w0.152: v1(17.907,-6.629) 19.193,-7.915 v1(19.193,-9.195)
H: J2.2 U1.78 | length 25.6
  Top Layer w0.152: U1.78 9.894,-22.798 9.627,-22.53 9.627,-5.639 12.933,-2.332 J2.2
ICE_CLK: J1.3 U2.14 | length 4.2
  Top Layer w0.152: J1.3 5.496,-12.278 U2.14
ICE_DAT: J1.2 U2.15 | length 4.4
  Top Layer w0.152: J1.2 4.846,-12.898 U2.15
ISET: R6.1 U1.31 | length 3.6
  Top Layer w0.254: U1.31 R6.1@30.095,-17.598
MCLK: J2.11 OSC1.3 R12.1 TP3.1 | length 18.2
  Top Layer w0.152: TP3.1 13.513,-4.547 17.501,-4.547 17.942,-4.988 ; J2.11 17.942,-4.988 ; OSC1.3 27.12,-5.454 26.06,-4.394 18.39,-4.394 17.942,-4.842 17.942,-4.988
NetC35_1: C35.1 U3.1 | length 1.7
  Top Layer w0.254: U3.1 9.802,-32.012 C35.1
NetC35_2: C35.2 L11.1 U3.6 | length 1.9
  Top Layer w0.508: L11.1@11.024,-34.887 C35.2
NetC36_2: C36.2 R10.2 R11.1 U3.3 | length 7.9
  Top Layer w0.254: U3.3 7.534,-32.09 8.458,-31.166 11.743,-31.166 R10.2 C36.2 ; 10.381,-31.132 R11.1
NetC37_1: C37.1 D2.2 R8.1 U3.5 | length 2.6
  Top Layer w0.254: R8.1 6.587,-35.916 8.433,-35.916
NetC38_1: C38.1 R8.2 R9.1 | length 4.8
  Top Layer w0.254: C38.1 5.994,-30.262 R9.1 5.967,-31.987 5.232,-32.721 5.232,-33.561 R8.2
NetL12_1: L12.1 U6.6 | length 1.5
  Bottom Layer w0.152: U6.6 L12.1@16.127,-20.284
NetR9_2: R9.2 U3.4 | length 3
  Top Layer w0.254: R9.2 6.571,-32.987 7.534,-33.95 U3.4
NetR13_2: "R12 0R/NC.1" R13.2 U6.4 | length 4.5
  Bottom Layer w0.152: U6.4 15.001,-18.593 16.68,-18.593 17.374,-19.287 R13.2
NetR14_1: R14.1 U6.3 | length 1.9
  Bottom Layer w0.152: R14.1 10.462,-18.984 U6.3
NetTP1_1: TP1.1 U1.80 | length 2.3
  Top Layer w0.152: TP1.1@8.89,-24.098 U1.80
PWDN: J2.1 TP2.1 | length 2.6
  Top Layer w0.152: TP2.1 12.776,-6.169 14.71,-6.169 14.942,-5.937 J2.1
RESETB: C32.1 J1.4 J2.4 R5.1 U1.6 U2.5 | length 49.6
  Top Layer w0.152: C32.1@1.753,-25.033 C32.1 2.659,-24.126 R5.1 2.659,-22.665 3.048,-22.276 v1(4.191,-22.276) 4.196,-22.271 U2.5 4.196,-16.744 v1(4.191,-16.739) ; v1(11.303,-9.906) 11.303,-5.41 13.538,-3.175 15.596,-3.175 15.842,-2.929 J2.4 ; U1.6 15.943,-21.599 v1(16.231,-21.311)
  Bottom Layer w0.152: v1(4.191,-22.276) 5.156,-21.311 v1(16.231,-21.311) ; v1(4.191,-16.739) 4.191,-13.005 J1.4 7.29,-9.906 v1(11.303,-9.906)
SPC: J2.14 R1.1 TP5.1 U1.39 U2.8 | length 50.5
  Top Layer w0.152: U2.8 6.146,-19.66 8.763,-17.043 v1@8.763,-10.477 ; v1@8.836,-10.414 v1(8.773,-10.477) 8.773,-7.198 8.509,-6.934 8.509,-5.867 12.929,-1.448 18.491,-1.448 18.842,-1.799 J2.14 ; v1(21.514,-11.735) 22.177,-12.398 U1.39 27.633,-12.398 28.016,-12.014 TP5.1
  Bottom Layer w0.152: v1@6.155,-19.601 R1.1 ; v1(8.773,-10.477) 8.938,-10.643 20.422,-10.643 v1(21.514,-11.735)
  other v1: 6.146,-19.609
SPD: J2.13 R2.1 TP4.1 U1.38 U2.7 | length 49.2
  Top Layer w0.152: v1(5.309,-17.551) 5.496,-17.739 5.496,-19.523 ; U2.7 5.496,-19.523 ; v1(8.026,-7.214) 8.258,-7.445 8.258,-11.706 v1(8.255,-11.709) ; v1@8.258,-11.709 8.258,-16.761 5.496,-19.523 ; v1(12.014,-7.214) 12.017,-7.217 18.132,-7.217 18.542,-6.807 J2.13 ; v1(20.803,-11.913) 21.938,-13.048 U1.38
  Bottom Layer w0.152: v1(5.309,-17.551) R2.1 ; v1(8.026,-7.214) v1(12.014,-7.214) ; v1(8.255,-11.709) 8.966,-10.998 19.888,-10.998 v1(20.803,-11.913)
V: J2.3 U1.79 | length 25.6
  Top Layer w0.152: v1(9.119,-6.604) 9.274,-6.76 9.274,-22.711 10.011,-23.448 U1.79 ; v1(15.011,-6.655) 15.542,-6.124 J2.3
  Bottom Layer w0.152: v1(9.119,-6.604) 9.169,-6.655 v1(15.011,-6.655)
V12V: D2.1 J3.1
VCC1_8: C46.1 L6.1 L7.1 L8.1 U5.6 | length 64.9
  Top Layer w0.254: C46.1 v1(13.575,-29.147) ; U5.6 v1(27.087,-37.755)
  Signal Layer 1 w0.254: v1@16.586,-15.088 v1(16.586,-3.912) ; v1(27.087,-37.755) 27.62,-37.222 27.62,-16.297 v1(28.321,-15.596)
  Signal Layer 2 w0.254: v1(16.535,-15.138) v1@16.586,-15.088
  Bottom Layer w0.254: v1(13.575,-29.147) 14.248,-29.82 26.949,-29.82 v1(27.622,-29.147) ; L8.1 15.4,-3.48 15.832,-3.912 v1(16.586,-3.912) ; v1(16.535,-15.138) L7.1 22.546,-15.934 L6.1 23.63,-15.596 v1(28.321,-15.596)
VCC2_5: C43.1 L4.1 L5.1 U4.6 | length 9.3
  Top Layer w0.508: U4.6 v1(22.184,-37.658) ; v1(23.901,-33.858) C43.1@23.901,-32.754 ; C43.1@23.927,-32.729 L5.1 L4.1
  Signal Layer 1 w0.508: v1(22.184,-37.658) 23.901,-35.941 v1(23.901,-33.858)
VCC5: C36.1 C39.1 C40.1 C41.1 C44.1 L11.2 R10.1 U4.1 U4.2 U4.3 U5.1 U5.2 U5.3 | length 16.1
  Top Layer w0.508: 13.378,-34.501 C36.1 R10.1 ; C39.1 U4.3@20.262,-36.016 ; C41.1 20.308,-36.014 20.332,-36.038 U4.2 U4.1 U5.3 ; C44.1@25.187,-34.393 U5.3 ; U5.1 U5.2 U5.3
VDD: C30.1 C42.1 J1.1 L1.1 L2.1 L3.1 L12.2 R1.2 R2.2 R5.2 U2.20 U4.4 U6.5 | length 80.5
  Top Layer w0.254: v1(1.6,-18.237) 1.6,-15.752 U2.20@1.596,-15.748 ; R5.2 0.635,-22.344 0.635,-19.152 1.596,-18.19 U2.20@1.596,-15.748 ; J1.1 1.583,-11.803 C30.1 1.596,-13.247 U2.20 U2.20@1.596,-15.748 ; v1(31.209,-24.605) L3.1
  Top Layer w0.508: C42.1 U4.4@20.201,-38.721 ; U4.4 v1(20.284,-37.551)
  Signal Layer 1 w0.254: v1(8.204,-18.872) 14.757,-18.872 v1(15.519,-19.634) ; v1(15.265,-23.216) 15.519,-22.962 v1(15.519,-19.634) ; v1(18.574,-14.612) 18.574,-16.579 v1(15.519,-19.634)
  Signal Layer 1 w0.508: v1(15.265,-23.216) 15.265,-25.044 20.284,-30.063 v1(20.284,-37.551)
  Bottom Layer w0.254: v1(1.6,-18.237) 7.15,-18.237 ; R2.2 7.15,-18.237 ; v1(8.204,-18.872) R1.2 7.15,-18.867 7.15,-18.237 ; U6.5 v1(15.519,-19.634) 15.781,-19.634 L12.2 ; L1.1 16.276,-23.231 16.853,-22.654 20.876,-22.654 22.827,-24.605 v1(31.209,-24.605) ; v1(18.574,-14.612) L2.1
  Bottom Layer w0.508: v1(15.265,-23.216) L1.1@16.244,-23.216
VDD_MEM: C14.1 C15.1 C16.1 C17.1 L5.2 U1.14 U1.44 U1.45 | length 24.9
  Top Layer w0.254: v1(21.143,-24.038) U1.14 21.143,-30.001 C14.1 23.921,-30.219 L5.2 ; U1.45 U1.44 23.093,-11.832 v1(23.089,-11.836)
  Signal Layer 1 w0.254: v1@21.157,-24.024 v1(21.157,-15.265)
  Signal Layer 2 w0.254: v1(21.143,-24.038) v1@21.157,-24.024
  Bottom Layer w0.254: v1(21.157,-15.265) 21.157,-13.217 C17.1 23.19,-12.479 C16.1 23.093,-12.366 v1@23.093,-11.836
VDDIO: C6.1 C7.1 C8.1 L2.2 U1.51 | length 6.7
  Top Layer w0.254: v1(18.542,-11.887) U1.51@18.542,-10.273
  Bottom Layer w0.254: C6.1 15.417,-12.683 C8.1 C7.1 L2.2 18.542,-12.65 v1(18.542,-11.887)
VDDQ: C11.1 C12.1 C13.1 L4.2 U1.10 U1.18 | length 17.7
  Top Layer w0.254: U1.10 v1(18.542,-27.102) 18.543,-29.884 C12.1 ; U1.18 23.743,-28.836 L4.2 C13.1 27.615,-30.214 C11.1
  Signal Layer 1 w0.254: v1(18.542,-27.102) v1(23.749,-27.102)
XI: C19.1 R12.2 U1.35 X1.1 | length 8
  Top Layer w0.152: U1.35 30.799,-14.998 v1@31.28,-14.516 ; v1@31.282,-14.514 X1.1@31.282,-12.128
  Bottom Layer w0.152: C19.1 31.285,-14.521 v1(31.293,-14.529)
XO: C18.1 U1.36 X1.3 | length 8.5
  Top Layer w0.152: U1.36 27.943,-14.348 29.007,-13.284 29.007,-11.403 29.982,-10.428 v1@29.982,-9.358
  Bottom Layer w0.152: C18.1 v1(29.972,-9.347)
Y0: C26.1 U2.10 X2.3 | length 4.8
  Top Layer w0.152: X2.3@7.073,-25.029 6.383,-24.34 C26.1 7.446,-22.305 U2.10
Y1: C27.1 U2.9 X2.1 | length 7.2
  Top Layer w0.152: X2.1@5.373,-26.329 4.612,-26.329 4.369,-26.086 4.369,-24.02 C27.1 6.796,-21.593 U2.9
pads on no net: "R12 0R/NC.0" C1.0 C2.0 C3.0 C4.0 C5.0 C6.0 C7.0 C8.0 C9.0 C10.0 C11.0 C12.0 C13.0 C14.0 C15.0 C16.0 C17.0 C18.0 C19.0 C20.0 C21.0 C22.0 C23.0 C24.0 C25.0 C26.0 C27.0 C28.0 C29.0 C30.0 C31.0 C32.0 C33.0 C34.0 C35.0 C36.0 C37.0 C38.0 C39.0 C40.0 C41.0 C42.0 C43.0 C44.0 C45.0 C46.0 C47.0 C48.0 D1.0 J2. J3.SM L1.0 L2.0 L3.0 L4.0 L5.0 L6.0 L7.0 L8.0 L9.0 L10.0 L11.0 L12.0 OSC1.1 R1.0 R2.0 R3.0 R4.0 R5.0 R6.0 R7.0 R8.0 R9.0 R10.0 R11.0 R12.0 R13.0 R14.0 U1.1 U1.2 U1.3 U1.15 U1.16 U1.17 U1.20 U1.21 U1.22 U1.23 U1.25 U1.27 U1.40 U1.41 U1.42 U1.43 U1.60 U1.61 U1.62 U1.63 U1.64 U1.65 U1.66 U1.67 U1.70 U1.71 U1.72 U1.73 U1.74 U1.75 U1.76 U1.77 U2.0 U2.1 U2.2 U2.3 U2.4 U2.6 U2.11 U2.12 U2.13 U2.16 U2.17 U2.18 U2.19 U3.0 U4.0 U5.0

## Polygon pours and split planes (outlines as drawn)
AGND on Signal Layer 2 "GND_POWER" (solid, pour order 6): 0,0 0,-40 32.207,-40 32.207,0
AGND on Signal Layer 2 "GND_GROUND" (solid, pour order 8): 0,0 0,-40 32.207,-40 32.207,0
AGND on Signal Layer 1 "GND_POWER" (solid, pour order 10): 0,0 0,-40 32.207,-40 32.207,0
no net on Mechanical 15 (solid): 52.893,4.247 52.893,-2.723 54.163,-2.723 54.163,-38.915 52.893,-38.915 52.893,-45.885 60.513,-45.885 60.513,-38.915 59.243,-38.915 59.243,-2.723 60.513,-2.723 60.513,4.247 52.893,4.247

## Keep-outs
Keep-Out Layer:
  the board outline again, w0.1

## Other copper
Top Layer:
  rectangle net AGND: 2.413,-33.274 4.623,-31.242
  region net NetC37_1: 8.179,-34.519 8.179,-38.252 8.712,-38.786 10.465,-38.786 11.608,-37.643 13.081,-37.643 13.157,-37.567 13.157,-36.805 12.802,-36.449 9.22,-36.449 8.738,-35.966 8.738,-34.595 8.661,-34.519
  region net NetC35_2: 9.169,-35.484 10.414,-35.484 10.77,-35.839 11.322,-35.839 11.362,-35.8 11.362,-33.942 11.176,-33.757 9.652,-33.757 9.169,-34.239
  region net VCC5: 12.362,-34.05 12.362,-35.273 13.716,-36.627 17.805,-36.627 17.958,-36.474 17.958,-34.62 17.399,-34.061
  region net V12V: 0.66,-34.95 3.048,-34.95 4.394,-36.297 4.394,-38.532 4.699,-38.837 6.502,-38.837 6.502,-37.033 5.283,-35.814 5.283,-35.027 3.886,-33.63 0.66,-33.63
  text "*  SURFACE - AIR 0 MIL" at 29.794,-28.27 h2 r90
  text "*  SURFACE - AIR 0 MIL" at 29.87,-28.727 h2 r90
  text "*  SURFACE - AIR 0 MIL" at 30.81,-28.727 h2 r90

## Silkscreen, mask and mechanical layers (free items; w line width, h text height)
Top Overlay:
  lines w0.102: 18.148,-0.838 18.406,-0.838 18.406,-0.406
Top Paste:
  text "String" at 90.602,6.756 h1.52
  text "String" at 80.747,2.489 h1.52
  text "String" at 80.62,-2.184 h1.52
  text "String" at 86.843,-4.75 h1.52
  text "String" at 91.364,-43.459 h1.52
Mechanical 5:
  text "*  SURFACE - AIR 0 MIL" at 93.836,9.674 h3.17
  text "*  DIELECTRIC - CONFORMAL_COAT 0.7 MIL" at 93.836,4.386 h3.17
  text "*  SURFACE - AIR 0 MIL" at 86.665,3.378 h2 r90
  text "RXD" at 80.086,2.21 h2 r90
  text "*  SURFACE - AIR 0 MIL" at 84.353,1.88 h2 r90
  text "*  SURFACE - AIR 0 MIL" at 83.744,1.549 h2 r90
  text "RXD" at 78.181,1.168 h2 r90
  text "L1: TOP CONDUCTOR - COPPER 1.4 MIL" at 93.836,0.154 h3.17
  text "*  SURFACE - AIR 0 MIL" at 70.021,-1.243 h3.17
  text "*  SURFACE - AIR 0 MIL" at 93.04,-2.337 h2 r90
  text "*  DIELECTRIC - FR-4 6.8 MIL" at 93.836,-4.078 h3.17
  text "*  SURFACE - AIR 0 MIL" at 103.505,-4.826 h2 r90
  text "*  SURFACE - AIR 0 MIL" at 72.434,-7.898 h3.17
  text "L2: GND PLANE - COPPER 0.7 MIL" at 93.836,-8.309 h3.17
  text "*  SURFACE - AIR 0 MIL" at 91.491,-8.636 h2 r90
  text "*  SURFACE - AIR 0 MIL" at 66.312,-11.073 h3.17
  text "*  DIELECTRIC - FR-4 44.8 MIL" at 93.836,-16.796 h3.17
  text "L3: SIGNAL_A PLANE - COPPER 0.7 MIL" at 93.836,-32.203 h3.17
  text "*  DIELECTRIC - FR-4 6.8 MIL" at 93.836,-36.435 h3.17
  text "L4: BOTTOM CONDUCTOR - COPPER 1.4 MIL" at 93.836,-40.666 h3.17
  text "*  DIELECTRIC - CONFORMAL_COAT 0.7 MIL" at 93.836,-46.092 h3.17
  text "*  SURFACE - AIR 0 MIL" at 93.836,-50.324 h3.17
  text "___________________________" at 44.306,-57.73 h3.17
  text "DESIGN CROSS SECTION CHART" at 45.576,-57.73 h3.17
  text "TOTAL THICKNESS 64.3 MIL" at 48.116,-64.08 h3.17
Mechanical 15:
  region: 42.733,-9.642 73.213,-9.642 73.213,-6.157 42.733,-6.157
  region: 42.733,-45.882 73.213,-45.882 73.213,-38.913 42.733,-38.913
  region: 42.733,-35.479 73.213,-35.479 73.213,-31.994 42.733,-31.994
  region: 42.733,-2.723 73.213,-2.723 73.213,4.247 42.733,4.247
  lines w0.025: 42.733,-46.23 73.213,-46.23 73.213,-45.882 42.733,-45.882 42.733,-46.23 ; 42.733,-38.913 73.213,-38.913 73.213,-35.479 42.733,-35.479 42.733,-38.913 ; 42.733,-31.994 73.213,-31.994 73.213,-9.642 42.733,-9.642 42.733,-31.994 ; 42.733,-6.157 73.213,-6.157 73.213,-2.723 42.733,-2.723 42.733,-6.157 ; 42.733,4.247 73.213,4.247 73.213,4.595 42.733,4.595 42.733,4.247
  lines w0.1: 12,-8 25.171,-8 25.171,-3 12,-3 12,-8
  text "1-4" at 56.703,7.422 h3.17 r90
  text "*  SURFACE - AIR 0 MIL" at 73.213,5.652 h3.17
  text "*  DIELECTRIC - CONFORMAL_COAT 0.7 MIL" at 73.213,0.363 h3.17
  text "L1: TOP CONDUCTOR - COPPER 1.4 MIL" at 73.213,-3.868 h3.17
  text "*  DIELECTRIC - FR-4 6.8 MIL" at 73.213,-8.1 h3.17
  text "L2: GND PLANE - COPPER 0.7 MIL" at 73.213,-12.332 h3.17
  text "*  DIELECTRIC - FR-4 44.8 MIL" at 73.213,-20.818 h3.17
  text "L3: SIGNAL_A PLANE - COPPER 0.7 MIL" at 73.213,-36.225 h3.17
  text "*  DIELECTRIC - FR-4 6.8 MIL" at 73.213,-40.457 h3.17
  text "L4: BOTTOM CONDUCTOR - COPPER 1.4 MIL" at 73.213,-44.689 h3.17
  text "*  DIELECTRIC - CONFORMAL_COAT 0.7 MIL" at 73.213,-50.114 h3.17
  text "*  SURFACE - AIR 0 MIL" at 73.213,-54.346 h3.17
  text "___________________________" at 23.683,-61.752 h3.17
  text "DESIGN CROSS SECTION CHART" at 24.953,-61.752 h3.17
  text "TOTAL THICKNESS 64.3 MIL" at 27.493,-68.102 h3.17
Mechanical 16:
  drawing of 1882 lines, arcs and shapes, not listed
  text "1" at -153.255,106.172 h1.78
  text "2" at -104.216,106.172 h1.78
  text "3" at -54.957,106.172 h1.78
  text "4" at -5.664,106.172 h1.78
  text "5" at 43.612,106.172 h1.78
  text "6" at 92.634,106.172 h1.78
  text "7" at 142.164,106.172 h1.78
  text "8" at 191.186,106.172 h1.78
  text "A" at -175.387,72.187 h1.78
  text "A" at 213.233,72.187 h1.78
  text "1-4" at 62.475,9.984 h3.17 r90
  text "*  SURFACE - AIR 0 MIL" at 78.985,8.214 h3.17
  text "*  DIELECTRIC - CONFORMAL_COAT 0.7 MIL" at 78.985,2.926 h3.17
  text "B" at -175.387,1.575 h1.78
  text "B" at 213.233,1.575 h1.78
  text "L1: TOP CONDUCTOR - COPPER 1.4 MIL" at 78.985,-1.306 h3.17
  text "*  DIELECTRIC - FR-4 6.8 MIL" at 78.985,-5.538 h3.17
  text "L2: GND PLANE - COPPER 0.7 MIL" at 78.985,-9.769 h3.17
  text "*  DIELECTRIC - FR-4 44.8 MIL" at 78.985,-18.255 h3.17
  text "L3: SIGNAL_A PLANE - COPPER 0.7 MIL" at 78.985,-33.663 h3.17
  text "*  DIELECTRIC - FR-4 6.8 MIL" at 78.985,-37.895 h3.17
  text "L4: BOTTOM CONDUCTOR - COPPER 1.4 MIL" at 78.985,-42.126 h3.17
  text "*  DIELECTRIC - CONFORMAL_COAT 0.7 MIL" at 78.985,-47.552 h3.17
  text "*  SURFACE - AIR 0 MIL" at 78.985,-51.783 h3.17
  text "___________________________" at 29.455,-59.19 h3.17
  text "DESIGN CROSS SECTION CHART" at 30.725,-59.19 h3.17
  text "TOTAL THICKNESS 64.3 MIL" at 33.265,-65.54 h3.17
  text "C" at -175.387,-69.037 h1.78
  text "C" at 213.233,-69.037 h1.78
  text "D" at -175.387,-139.141 h1.78
  text "D" at 213.233,-139.141 h1.78
  text "ENGINEER:" at 98.298,-139.319 h1.14
  text "TITLE:" at 136.398,-139.319 h1.14
  text "PCB DESIGNER:" at 98.298,-146.812 h1.14
  text "DATE:" at 98.298,-154.559 h1.14
  text "PART NO.:" at 136.398,-154.559 h1.14
  text "REV:" at 189.738,-154.559 h1.14
  text "Altium Limited" at 65.278,-157.099 h1.78
  text ".PRINT_DATE" at 99.568,-157.607 h1.78
  text "12a Rodborough Rd" at 65.278,-159.639 h1.78
  text "Frenchs Forest" at 65.278,-162.179 h1.78
  text "FILE NAME:" at 98.298,-162.179 h1.14
  text "DWG NO:" at 136.398,-162.179 h1.14
  text "SCALE:" at 189.738,-162.179 h1.14
  text "NSW 2086" at 65.278,-164.719 h1.78
  text ".PCB_FILE_NAME_NO_PATH" at 99.568,-165.227 h1.78
  text "1" at -153.255,-170.688 h1.78
  text "2" at -104.216,-170.688 h1.78
  text "3" at -54.957,-170.688 h1.78
  text "4" at -5.664,-170.688 h1.78
  text "5" at 43.612,-170.688 h1.78
  text "6" at 92.634,-170.688 h1.78
  text "7" at 142.164,-170.688 h1.78
  text "8" at 191.186,-170.688 h1.78

## Text inside footprints (layer, text, board x,y; h text height)
J3: Top Overlay "3" at -0.051,-30.48 h0.89 r90; Top Overlay "2" at -0.051,-32.512 h0.89 r90; Top Overlay "1" at -0.051,-34.544 h0.89 r90; Top Overlay "Vin" at 4.648,-34.798 h0.89 r90; Top Overlay "C_O" at 4.648,-31.496 h0.89 r90